# EAGLE board ArduinoBoard (EAGLE 9.3.1)

Size 160 x 100 mm. Coordinates in mm from the lower left corner, seen from the top.
Outline: 0,0 160,0 160,100 0,100 0,0
Copper layers (1*16): Top 0.035mm / dielectric 1.5mm / Bottom 0.035mm
Design rules "default": minimum track width 6mil, minimum drill 0.35mm, track to track 6mil, track to pad 6mil, pad to pad 6mil, via to via 6mil, smd to smd 6mil, copper to edge 40mil, drill to drill 6mil, minimum pad ring 10mil, minimum via ring 8mil, stop-mask expansion 4mil, vias tented up to drill 0mil, thermal gap 10mil
Net classes: 0 default: clearance 0.1 mm; 1 0.7A: width 0.2 mm, clearance 0.1 mm; 2 1A: width 0.3 mm, clearance 0.1 mm; 3 2A: width 0.8 mm, clearance 0.15 mm; 4 3A: width 1.4 mm, clearance 0.15 mm; 5 7A: width 5 mm, clearance 0.2 mm; 6 0.4A (low-power): width 0.1 mm, clearance 0.05 mm; 7 10A: width 6.5 mm, clearance 0.3 mm

## Footprints (pad centres in the part's own frame; a part is rotated, then mirrored left to right if it is on the bottom)
T821140A1S100CEU_SHDR40W64P254X254_2X20_5842X89 = drill 1.1 pad 1.65 square: 1 0,0 | drill 1.1 pad 1.65: 2 0,2.54; 3 2.54,0; 4 2.54,2.54; 5 5.08,0; 6 5.08,2.54; 7 7.62,0; 8 7.62,2.54; 9 10.16,0; 10 10.16,2.54; 11 12.7,0; 12 12.7,2.54; 13 15.24,0; 14 15.24,2.54; 15 17.78,0; 16 17.78,2.54; 17 20.32,0; 18 20.32,2.54; 19 22.86,0; 20 22.86,2.54; 21 25.4,0; 22 25.4,2.54; 23 27.94,0; 24 27.94,2.54; 25 30.48,0; 26 30.48,2.54; 27 33.02,0; 28 33.02,2.54; 29 35.56,0; 30 35.56,2.54; 31 38.1,0; 32 38.1,2.54; 33 40.64,0; 34 40.64,2.54; 35 43.18,0; 36 43.18,2.54; 37 45.72,0; 38 45.72,2.54; 39 48.26,0; 40 48.26,2.54
ARDUINO_MEGA = drill 1.016 pad 1.88: 0 13.97,24.13; 1 11.43,24.13; 2 8.89,24.13; 3 6.35,24.13; 3.3V -13.97,-24.13; 4 3.81,24.13; 5 1.27,24.13; 5V@0 -11.43,-24.13; 5V@1 44.45,24.13; 5V@2 46.99,24.13; 6 -1.27,24.13; 7 -3.81,24.13; 8 -7.874,24.13; 9 -10.414,24.13; 10 -12.954,24.13; 11 -15.494,24.13; 12 -18.034,24.13; 13 -20.574,24.13; 14 19.05,24.13; 15 21.59,24.13; 16 24.13,24.13; 17 26.67,24.13; 18 29.21,24.13; 19 31.75,24.13; 20 34.29,24.13; 21 36.83,24.13; A0 1.27,-24.13; A1 3.81,-24.13; A2 6.35,-24.13; A3 8.89,-24.13; A4 11.43,-24.13; A5 13.97,-24.13; A6 16.51,-24.13; A7 19.05,-24.13; A8 24.13,-24.13; A9 26.67,-24.13; A10 29.21,-24.13; A11 31.75,-24.13; A12 34.29,-24.13; A13 36.83,-24.13; A14 39.37,-24.13; A15 41.91,-24.13; AREF -25.654,24.13; GND@0 -8.89,-24.13; GND@1 -6.35,-24.13; GND@2 44.45,-19.05; GND@3 46.99,-19.05; GND@4 -23.114,24.13; RESET -16.51,-24.13; VIN -3.81,-24.13 | drill 1.016 pad 1.88 octagon: 22 44.45,21.59; 23 46.99,21.59; 24 44.45,19.05; 25 46.99,19.05; 26 44.45,16.51; 27 46.99,16.51; 28 44.45,13.97; 29 46.99,13.97; 30 44.45,11.43; 31 46.99,11.43; 32 44.45,8.89; 33 46.99,8.89; 34 44.45,6.35; 35 46.99,6.35; 36 44.45,3.81; 37 46.99,3.81; 38 44.45,1.27; 39 46.99,1.27; 40 44.45,-1.27; 41 46.99,-1.27; 42 44.45,-3.81; 43 46.99,-3.81; 44 44.45,-6.35; 45 46.99,-6.35; 46 44.45,-8.89; 47 46.99,-8.89; 48 44.45,-11.43; 49 46.99,-11.43; 50 44.45,-13.97; 51 46.99,-13.97; 52 44.45,-16.51; 53 46.99,-16.51 | hole 3.2: -34.29,24.13; -35.56,-24.13; 16.51,8.89; 16.51,-19.05; 40.64,24.13; 46.99,-24.13
SH25 = drill 1.321 pad 2.54 long: 1 -12.522,0; 2 12.522,0
1X04 = drill 1.016 pad 1.88: 1 0,0; 2 2.54,0; 3 5.08,0; 4 7.62,0
ULTRASONIC-HC-SR04#V = drill 1 square: 1 -3.81,0 | drill 1: 2 -1.27,0; 3 1.27,0; 4 3.81,0

## Placement (x,y rotation side)
ARDUINOKABEL1  T821140A1S100CEU_T821140A1S100CEU  [T821140A1S100CEU_SHDR40W64P254X254_2X20_5842X89]  -67.31,110.49 0 top  (outside the outline)
ARDUINOKABEL2  T821140A1S100CEU_T821140A1S100CEU  [T821140A1S100CEU_SHDR40W64P254X254_2X20_5842X89]  -67.31,120.65 0 top  (outside the outline)
B1  ARDUINO_MEGA_R3FULL  [ARDUINO_MEGA]  -66.04,29.21 0 top  (outside the outline)
F1  [SH25]  -107.95,-6.35 0 top  (outside the outline)
J1  [1X04]  -119.38,-17.78 0 top  (outside the outline)
U$1  ULTRASONIC-HC-SR04#V  [ULTRASONIC-HC-SR04#V]  -35.56,78.74 0 top  (outside the outline)
U$2  ULTRASONIC-HC-SR04#V  [ULTRASONIC-HC-SR04#V]  -81.28,78.74 0 top  (outside the outline)
U$3  ULTRASONIC-HC-SR04#V  [ULTRASONIC-HC-SR04#V]  -35.56,102.87 0 top  (outside the outline)
U$4  ULTRASONIC-HC-SR04#V  [ULTRASONIC-HC-SR04#V]  -81.28,102.87 0 top  (outside the outline)

## Library data of the parts
ARDUINOKABEL1 ARDUINOKABEL2 = BörningComponents; ARROW_PART_NUMBER: T821140A1S100CEU; DESCRIPTION: AMPHENOL - T821140A1S100CEU - HEADER, VERTICAL, 2.54MM, 40WAY; HEIGHT: 9.15mm; MANUFACTURER_NAME: Amphenol; MANUFACTURER_PART_NUMBER: T821140A1S100CEU
B1 = SparkFun-Boards
F1 = fuse; MF: SCHURTER; MPN: 0031.8211; OC_FARNELL: 1162741; OC_NEWARK: 96B9380
J1 = SparkFun-Connectors; PROD_ID: CONN-09696
U$1-U$4 = diy-modules

## Nets
0 [0.4A (low-power)]: ARDUINOKABEL1.8 B1.0
1 [0.4A (low-power)]: ARDUINOKABEL1.10 B1.1
2 [0.4A (low-power)]: ARDUINOKABEL1.12 B1.2 U$3.3
3 [0.4A (low-power)]: ARDUINOKABEL1.14 B1.3 U$4.3
3.3VA [0.4A (low-power)]: ARDUINOKABEL1.9 B1.3.3V
4 [0.4A (low-power)]: ARDUINOKABEL1.16 B1.4 U$4.2
5 [0.4A (low-power)]: ARDUINOKABEL1.18 B1.5 U$3.2
5V@0 [1A]: ARDUINOKABEL1.3 B1.5V@0 U$1.1 U$2.1 U$3.1 U$4.1
5V@1 [1A]: ARDUINOKABEL1.5 B1.5V@1
5V@2 [1A]: ARDUINOKABEL1.7 B1.5V@2
6: ARDUINOKABEL1.20 B1.6 U$1.2
7 [0.4A (low-power)]: ARDUINOKABEL1.22 B1.7
8 [0.4A (low-power)]: ARDUINOKABEL1.24 B1.8 U$2.2
9 [0.4A (low-power)]: ARDUINOKABEL1.26 B1.9
10 [0.4A (low-power)]: ARDUINOKABEL1.28 B1.10
11 [0.4A (low-power)]: ARDUINOKABEL1.30 B1.11
12 [0.4A (low-power)]: ARDUINOKABEL1.32 B1.12
12VAKKU [2A]: ARDUINOKABEL1.1 F1.2
13 [0.4A (low-power)]: ARDUINOKABEL2.3 B1.13
14 [0.4A (low-power)]: ARDUINOKABEL2.5 B1.14
15 [0.4A (low-power)]: ARDUINOKABEL2.7 B1.15
16 [0.4A (low-power)]: ARDUINOKABEL2.9 B1.16
17 [0.4A (low-power)]: ARDUINOKABEL2.11 B1.17
18 [0.4A (low-power)]: ARDUINOKABEL2.13 B1.18 U$1.3
19 [0.4A (low-power)]: ARDUINOKABEL2.15 B1.19 J1.2 U$2.3
20 [0.4A (low-power)]: ARDUINOKABEL2.17 B1.20
21 [0.4A (low-power)]: ARDUINOKABEL2.19 B1.21
22 [0.4A (low-power)]: ARDUINOKABEL2.21 B1.22
23 [0.4A (low-power)]: ARDUINOKABEL2.23 B1.23
24 [0.4A (low-power)]: ARDUINOKABEL2.25 B1.24
25 [0.4A (low-power)]: ARDUINOKABEL2.27 B1.25
26 [0.4A (low-power)]: ARDUINOKABEL2.29 B1.26
27 [0.4A (low-power)]: ARDUINOKABEL2.31 B1.27
28 [0.4A (low-power)]: ARDUINOKABEL2.33 B1.28
29 [0.4A (low-power)]: ARDUINOKABEL2.35 B1.29
30 [0.4A (low-power)]: ARDUINOKABEL2.37 B1.30
31: ARDUINOKABEL2.39 B1.31
32 [0.4A (low-power)]: ARDUINOKABEL2.2 B1.32
33 [0.4A (low-power)]: ARDUINOKABEL2.4 B1.33
34 [0.4A (low-power)]: ARDUINOKABEL2.6 B1.34
35 [0.4A (low-power)]: ARDUINOKABEL2.8 B1.35
36 [0.4A (low-power)]: ARDUINOKABEL2.10 B1.36
37 [0.4A (low-power)]: ARDUINOKABEL2.12 B1.37
38 [0.4A (low-power)]: ARDUINOKABEL2.14 B1.38
39 [7A]: ARDUINOKABEL2.16 B1.39
40 [0.4A (low-power)]: ARDUINOKABEL2.18 B1.40
41: ARDUINOKABEL2.20 B1.41
42 [0.4A (low-power)]: ARDUINOKABEL2.22 B1.42
43 [0.4A (low-power)]: ARDUINOKABEL2.24 B1.43
44: ARDUINOKABEL2.26 B1.44
45: ARDUINOKABEL2.28 B1.45
46 [0.4A (low-power)]: ARDUINOKABEL2.30 B1.46
47 [0.4A (low-power)]: ARDUINOKABEL2.32 B1.47
48 [0.4A (low-power)]: ARDUINOKABEL2.34 B1.48
49 [0.4A (low-power)]: ARDUINOKABEL2.36 B1.49
50 [0.4A (low-power)]: ARDUINOKABEL2.38 B1.50
51 [0.4A (low-power)]: ARDUINOKABEL2.40 B1.51
52: B1.52
53: B1.53
A0 [0.4A (low-power)]: ARDUINOKABEL1.15 B1.A0
A1 [0.4A (low-power)]: ARDUINOKABEL1.17 B1.A1
A2 [0.4A (low-power)]: ARDUINOKABEL1.19 B1.A2
A3 [0.4A (low-power)]: ARDUINOKABEL1.21 B1.A3
A4: ARDUINOKABEL1.23 B1.A4
A5 [0.4A (low-power)]: ARDUINOKABEL1.25 B1.A5
A6 [0.4A (low-power)]: ARDUINOKABEL1.27 B1.A6
A7 [0.4A (low-power)]: ARDUINOKABEL1.29 B1.A7
A8 [0.4A (low-power)]: ARDUINOKABEL1.31 B1.A8
A9 [0.4A (low-power)]: ARDUINOKABEL1.33 B1.A9
A10 [0.4A (low-power)]: ARDUINOKABEL1.35 B1.A10
A11 [0.4A (low-power)]: ARDUINOKABEL1.37 B1.A11
A12 [0.4A (low-power)]: ARDUINOKABEL1.39 B1.A12
A13: ARDUINOKABEL1.2 B1.A13
A14 [0.4A (low-power)]: ARDUINOKABEL1.4 B1.A14
A15 [0.4A (low-power)]: ARDUINOKABEL1.6 B1.A15
AREFA [0.4A (low-power)]: ARDUINOKABEL1.11 B1.AREF
GND@0 [1A]: ARDUINOKABEL1.34 B1.GND@0 U$1.4 U$2.4 U$3.4 U$4.4
GND@1 [1A]: ARDUINOKABEL1.36 B1.GND@1
GND@2 [1A]: ARDUINOKABEL1.38 B1.GND@2
GND@3 [1A]: ARDUINOKABEL1.40 B1.GND@3
GND@4: B1.GND@4
GNDAKKU [2A]: ARDUINOKABEL2.1
N$1: J1.4
N$2: J1.3
N$4: J1.1
RESETA [0.4A (low-power)]: ARDUINOKABEL1.13 B1.RESET
VIN: B1.VIN F1.1

## Tracks (layer width: path | path; a pad name or v marks a point on that pad's centre or on a via)
0  (1 unrouted)
1  (1 unrouted)
2  (2 unrouted)
3  (2 unrouted)
3.3VA  (1 unrouted)
4  (2 unrouted)
5  (2 unrouted)
5V@0  (5 unrouted)
5V@1  (1 unrouted)
5V@2  (1 unrouted)
6  (2 unrouted)
7  (1 unrouted)
8  (2 unrouted)
9  (1 unrouted)
10  (1 unrouted)
11  (1 unrouted)
12  (1 unrouted)
12VAKKU  (1 unrouted)
13  (1 unrouted)
14  (1 unrouted)
15  (1 unrouted)
16  (1 unrouted)
17  (1 unrouted)
18  (2 unrouted)
19  (3 unrouted)
20  (1 unrouted)
21  (1 unrouted)
22  (1 unrouted)
23  (1 unrouted)
24  (1 unrouted)
25  (1 unrouted)
26  (1 unrouted)
27  (1 unrouted)
28  (1 unrouted)
29  (1 unrouted)
30  (1 unrouted)
31  (1 unrouted)
32  (1 unrouted)
33  (1 unrouted)
34  (1 unrouted)
35  (1 unrouted)
36  (1 unrouted)
37  (1 unrouted)
38  (1 unrouted)
39  (1 unrouted)
40  (1 unrouted)
41  (1 unrouted)
42  (1 unrouted)
43  (1 unrouted)
44  (1 unrouted)
45  (1 unrouted)
46  (1 unrouted)
47  (1 unrouted)
48  (1 unrouted)
49  (1 unrouted)
50  (1 unrouted)
51  (1 unrouted)
A0  (1 unrouted)
A1  (1 unrouted)
A2  (1 unrouted)
A3  (1 unrouted)
A4  (1 unrouted)
A5  (1 unrouted)
A6  (1 unrouted)
A7  (1 unrouted)
A8  (1 unrouted)
A9  (1 unrouted)
A10  (1 unrouted)
A11  (1 unrouted)
A12  (1 unrouted)
A13  (1 unrouted)
A14  (1 unrouted)
A15  (1 unrouted)
AREFA  (1 unrouted)
GND@0  (5 unrouted)
GND@1  (1 unrouted)
GND@2  (1 unrouted)
GND@3  (1 unrouted)
RESETA  (1 unrouted)
VIN  (1 unrouted)